# EAGLE board hello9 (EAGLE 4.15)
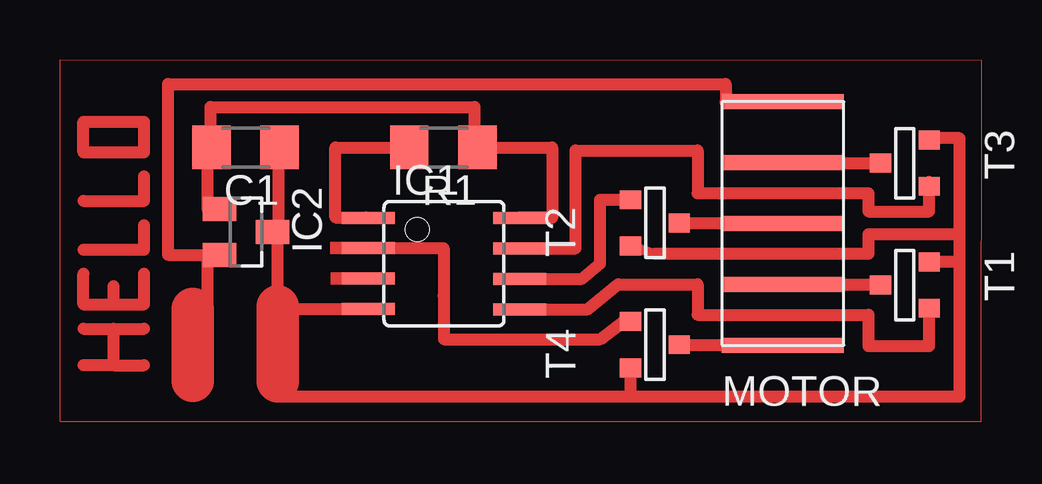
[diagram p0: board, top side]

No outline drawn. Coordinates in mm, seen from the top.
Copper layers (1*16): Top 0.035mm / dielectric 1.5mm / Bottom 0.035mm
Design rules "default": minimum track width 10mil, minimum drill 24mil, track to track 8mil, track to pad 8mil, pad to pad 8mil, via to via 8mil, smd to smd 8mil, copper to edge 40mil, drill to drill 8mil, minimum pad ring 10mil, minimum via ring 8mil, stop-mask expansion 4mil, vias tented up to drill 0mil, thermal gap 10mil

## Footprints (pad centres in the part's own frame; a part is rotated, then mirrored left to right if it is on the bottom)
1206 = smd 1.6 x 1.803: 1 -1.422,0; 2 1.422,0
SOIC8 = smd 0.5 x 2.2: 1 -1.905,-3.154; 2 -0.645,-3.154; 3 0.625,-3.154; 4 1.895,-3.154; 5 1.905,3.154; 6 0.635,3.154; 7 -0.635,3.154; 8 -1.905,3.154
SOT23 = smd 1 x 1.4: 1 -0.95,-1.1; 2 0.95,-1.1; 3 0,1.1
SMT_PINS_5 = smd 5.08 x 0.635: 1 0,0; 2 0,2.54; 3 0,5.08; 4 0,7.62; 5 0,10.16
SOT-23 = smd 0.787 x 0.889: 1 0.025,-1.016; 2 -0.94,1.016; 3 0.991,1.016

## Placement (x,y rotation side)
C1  3.3uF  [1206]  7.74,11.42 180 top
IC1  [SOIC8]  16.01,6.57 270 top
IC2  5V  [SOT23]  7.77,7.89 270 top
MOTOR  [SMT_PINS_5]  30.13,3.16 0 top
R1  10k  [1206]  15.99,11.42 180 top
T1  [SOT-23]  35.21,5.7 270 top
T2  [SOT-23]  24.8,8.24 90 top
T3  [SOT-23]  35.21,10.78 270 top
T4  [SOT-23]  24.8,3.16 90 top

## Library data of the parts
C1 IC1 IC2 MOTOR R1 T1-T4 = ng

## Nets
N$1: C1.2 IC1.8 IC2.1 R1.1
N$2: C1.1 IC1.4 IC2.3 T1.2 T2.2 T3.2 T4.2
N$3: IC2.2 MOTOR.5
N$4: IC1.5 T1.3
N$5: MOTOR.3 T2.1
N$6: IC1.1 R1.2
N$7: MOTOR.4 T3.1
N$12: MOTOR.1 T4.1
N$13: IC1.6 T2.3
N$14: IC1.7 T3.3
N$15: MOTOR.2 T1.1
N$16: IC1.2 T4.3

## Tracks (layer width: path | path; a pad name or v marks a point on that pad's centre or on a via)
N$1
  Top 0.406: 6.29,11.42 C1.2 6.17,11.43 6.24,11.5 | 17.28,11.42 R1.1
  Top 0.508: 6.29,11.42 6.29,13.1 17.28,13.1 17.28,11.42 | IC2.1 6.17,8.85 6.17,11.43 | R1.1 20.52,11.42 20.52,8.48 19.1,8.48 19.1,8.47 IC1.8
N$2
  Top 0.406: 24.8,6.97 T2.2 | 36.23,11.8 T3.2 | 9.14,11.47 9.14,11.42 C1.1 | 9.09,7.89 9.14,7.89 | 9.09,7.89 9.09,8.12 | 9.09,7.89 IC2.3 | 9.09,4.79 9.09,4.67 | 9.09,1.67 9.09,1.03
  Top 0.508: 24.8,6.97 33.69,6.97 33.69,7.79 37.5,7.79 | 37.5,7.79 37.5,11.8 36.23,11.8 | 37.5,6.64 T1.2 | 37.5,6.64 37.5,7.79 | 37.5,6.64 37.5,1.03 23.79,1.03 | 9.14,7.89 9.14,11.42 | 9.09,4.67 IC1.4 | 9.09,4.79 9.09,7.89 | 9.09,1.03 10.73,1.03 23.79,1.03 | 23.79,1.03 T4.2
  Top 1.778: 9.09,1.67 9.09,4.79
N$3
  Top 0.406: 27.74,13.32 MOTOR.5
  Top 0.508: IC2.2 4.51,6.94 4.51,14.06 27.74,14.06 27.74,13.32
N$4
  Top 0.406: IC1.5 19.24,4.66
  Top 0.508: T1.3 36.23,3.14 33.69,3.14 33.69,4.43 26.58,4.43 26.58,5.7 23.28,5.7 22.01,4.66 19.24,4.66
N$5
  Top 0.508: MOTOR.3 30.07,8.24 30.07,8.27 T2.1
N$6
  Top 0.406: IC1.1 12.76,8.47 12.76,8.5
  Top 0.508: R1.2 11.49,11.42 11.49,8.5 12.76,8.5
N$7
  Top 0.406: MOTOR.4 30.39,10.78 30.39,10.76
  Top 0.508: 30.39,10.76 T3.1
N$8
  Top 0.406: 5.54,4.68 6.16,4.56
  Top 0.508: 6.16,4.56 6.16,6.86
  Top 1.778: 5.54,1.69 5.54,4.68
N$10
  Top 0: 0.01,0 0.01,15.07 38.43,15.07 38.4,0 0.01,0
N$12
  Top 0.508: MOTOR.1 30.05,3.16 30.05,3.19 T4.1
N$13
  Top 0.406: IC1.6 19.24,5.93
  Top 0.508: 19.24,5.93 21.75,5.93 22.52,6.57 22.52,9.23 T2.3 | T2.3 | T2.3 23.77,9.22
N$14
  Top 0.406: T3.3 36.23,10.02 | IC1.7 19.06,7.2 19.01,7.2
  Top 0.508: T3.3 36.23,8.75 33.69,8.75 33.69,9.51 26.58,9.51 26.58,11.29 21.5,11.29 21.5,7.2 19.06,7.2
N$15
  Top 0.508: MOTOR.2 30.2,5.7 30.2,5.68 T1.1
N$16
  Top 0.406: 16,5.97 16,5.24 | T4.3 23.79,4.18 23.53,4.18
  Top 0.508: 16,5.24 16,3.42 22.52,3.42 23.53,4.18 | IC1.2 16,7.21 16,5.24
N$17
  Top 0.508: 2.25,2.33 3.52,2.33 | 2.25,2.33 0.98,2.33 | 2.25,2.33 2.25,3.85
N$19
  Top 0.508: 0.98,3.85 3.52,3.85
N$20
  Top 0.508: 2.25,4.87 0.98,4.87 0.98,6.14 | 2.25,4.87 3.52,4.87 3.52,6.14 | 2.25,4.87 2.25,5.63
N$21
  Top 0.508: 0.98,7.16 3.52,7.16 3.52,8.17
N$22
  Top 0.508: 0.98,9.19 3.52,9.19 3.52,10.2
N$23
  Top 0.508: 3.52,11.22 3.52,12.49 0.98,12.49 0.98,11.22 3.52,11.22
(copper drawn outside any net)
  shapes: Top area x2